# Altium PCB MotorDriverPCB.PcbDoc (part 2 of 2)
Units mm, origin at the board's own origin, x right, y up, seen from the top; angles counter-clockwise.
Board outline 100 x 50 mm, 2 copper layers (Top Layer, Bottom Layer); 108 components, 75 nets, 333 pads, 594 vias.
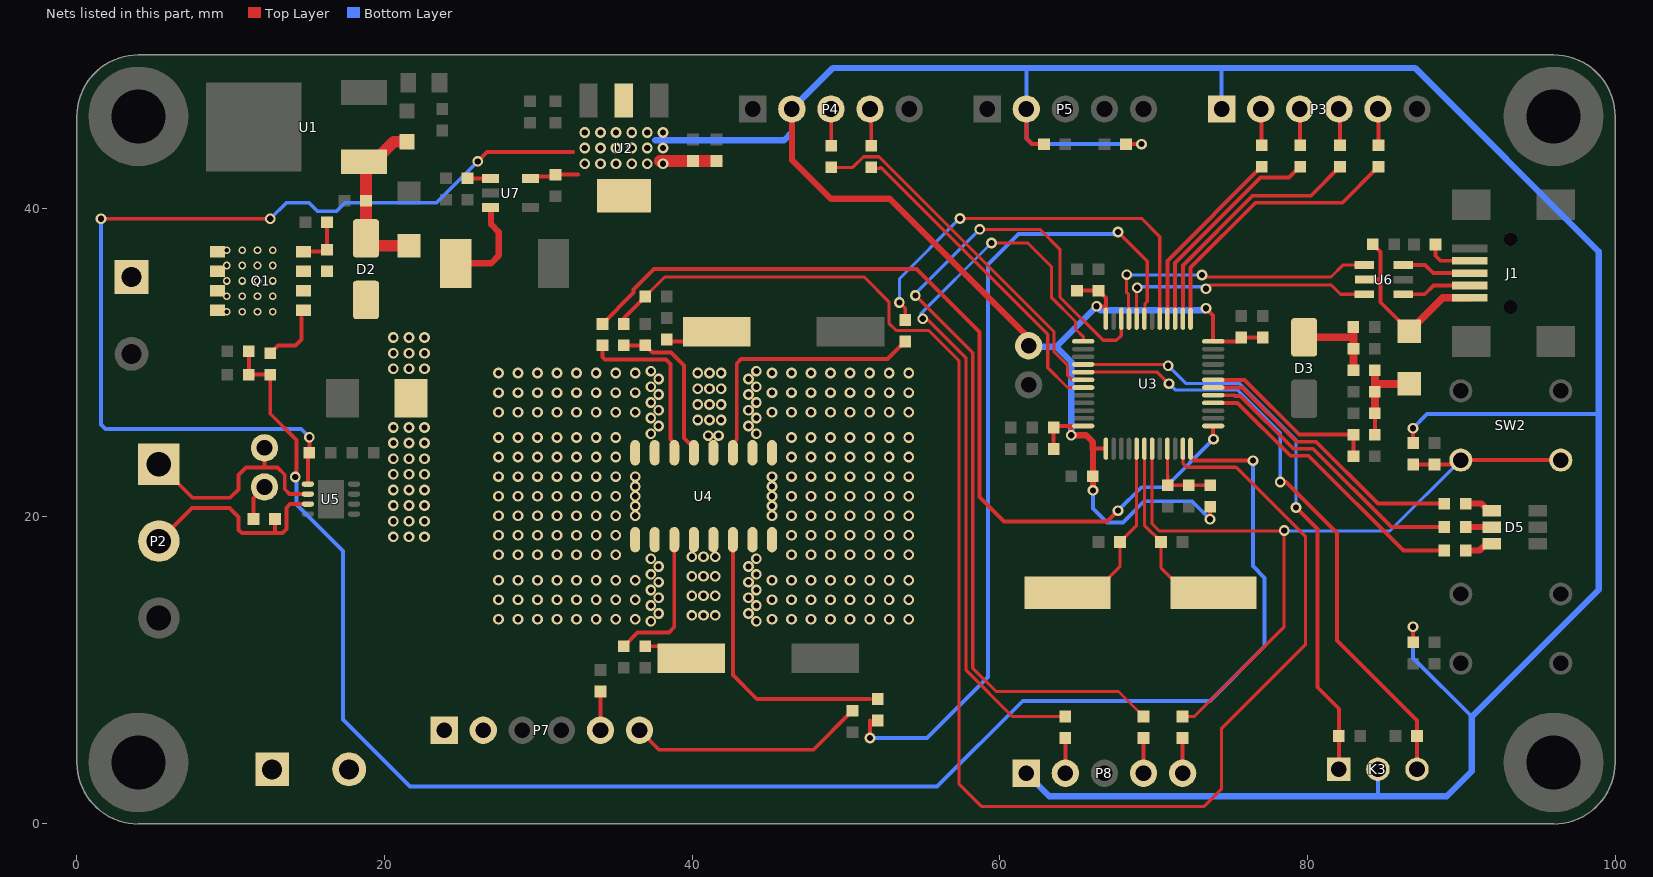
[diagram p2: the nets of this part, all layers, seen from the top]

## Via types
v1: diameter 0.7, hole 0.4, Top Layer to Bottom Layer, tented both sides, 546 vias
v2: diameter 1, hole 0.5, Top Layer to Bottom Layer, 24 vias
v3: diameter 0.5, hole 0.3, Top Layer to Bottom Layer, tented bottom, 20 vias
v4: diameter 0.5, hole 0.33, Top Layer to Bottom Layer, tented bottom, 4 vias

## Nets (pads, with @x,y where several pads share a name; then routed paths per layer and width w, separated by ;. In a path a pad name is that pad's centre, name@x,y a point inside that pad or via, vN(x,y) a via of type N, cw(c..) or ccw(c..) an arc to the next point about the centre after c; other vN are vias at no path point) (continued)
INB: R19.1 U3.31 | length 53.4
  Top Layer w0.203: v1(67.691,38.481) 69.584,36.588 69.584,33.964 69.442,33.822 69.442,32.896 U3.31@69.397,32.851
  Top Layer w0.254: v1(51.562,5.588) 51.562,6.731
  Bottom Layer w0.254: v1(51.562,5.588) 55.27,5.588 59.233,9.55 59.233,36.373 61.214,38.354 67.818,38.354 v1(67.691,38.481)
LED_B: R17.1 U3.16 | length 19
  Top Layer w0.254: U3.16@73.872,27.376 75.459,27.376 78.898,23.937 80.076,23.937 86.233,17.78 R17.1@88.9,17.78
LED_G: R15.1 U3.17 | length 18.6
  Top Layer w0.254: U3.17@73.872,27.876 75.248,27.876 75.291,27.833 75.649,27.833 79.087,24.395 80.369,24.395 85.459,19.304 R15.1@88.9,19.304
LED_R: R12.1 U3.18 | length 18.2
  Top Layer w0.254: U3.18@73.872,28.376 75.753,28.376 79.277,24.852 80.558,24.852 84.582,20.828 R12.1@88.9,20.828
MASTER: K3.1 R33.2 U3.40 | length 38.6
  Top Layer w0.203: U3.40@65.422,29.876 v1@70.861,29.876
  Top Layer w0.254: v1(79.248,20.574) 80.645,19.177 80.645,8.89 82.042,7.493 R33.2@82.042,5.461 ; K3.1@82.042,3.556 R33.2@82.042,5.715
  Bottom Layer w0.203: v1(70.942,29.794) 72.111,28.626 75.606,28.626 79.248,24.984 v1(79.248,20.574)
MOT+: P6.1 P7.1 U4.2 U4.15
  other v1: 37.313,13.183 27.407,13.31 28.677,13.31 29.947,13.31 31.217,13.31 32.487,13.31 33.757,13.31 35.027,13.31 36.297,13.31 37.821,13.691 37.313,14.199 27.407,14.58 28.677,14.58 29.947,14.58 31.217,14.58 32.487,14.58 33.757,14.58 35.027,14.58 36.297,14.58 37.821,14.707 37.313,15.215 37.821,15.723 27.407,15.85 28.677,15.85 29.947,15.85 31.217,15.85 32.487,15.85 33.757,15.85 35.027,15.85 36.297,15.85 37.313,16.231 37.821,16.739 37.313,17.247 37.313,25.375 37.821,25.883 37.313,26.391 27.407,26.772 28.677,26.772 29.947,26.772 31.217,26.772 32.487,26.772 33.757,26.772 35.027,26.772 36.297,26.772 37.821,26.899 37.313,27.407 37.821,27.915 27.407,28.042 28.677,28.042 29.947,28.042 31.217,28.042 32.487,28.042 33.757,28.042 35.027,28.042 36.297,28.042 37.313,28.423 37.821,28.931 27.407,29.312 28.677,29.312 29.947,29.312 31.217,29.312 32.487,29.312 33.757,29.312 35.027,29.312 36.297,29.312 37.313,29.439
MOT-: P6.2 P7.2 U4.7 U4.10
  other v1: 44.171,13.183 45.187,13.31 46.457,13.31 47.727,13.31 48.997,13.31 50.267,13.31 51.537,13.31 52.807,13.31 54.077,13.31 43.663,13.691 44.171,14.199 45.187,14.58 46.457,14.58 47.727,14.58 48.997,14.58 50.267,14.58 51.537,14.58 52.807,14.58 54.077,14.58 43.663,14.707 44.171,15.215 43.663,15.723 45.187,15.85 46.457,15.85 47.727,15.85 48.997,15.85 50.267,15.85 51.537,15.85 52.807,15.85 54.077,15.85 44.171,16.231 43.663,16.739 44.171,17.247 44.171,25.375 43.663,25.883 44.171,26.391 45.187,26.772 46.457,26.772 47.727,26.772 48.997,26.772 50.267,26.772 51.537,26.772 52.807,26.772 54.077,26.772 43.663,26.899 44.171,27.407 43.663,27.915 45.187,28.042 46.457,28.042 47.727,28.042 48.997,28.042 50.267,28.042 51.537,28.042 52.807,28.042 54.077,28.042 44.171,28.423 43.663,28.931 45.187,29.312 46.457,29.312 47.727,29.312 48.997,29.312 50.267,29.312 51.537,29.312 52.807,29.312 54.077,29.312 44.171,29.439
NetC1_1: C1.1 C2.1 D1.K D2.K U1.1 | length 9.7
  Top Layer w0.762: U1.1@18.669,43.053 19.304,43.053 20.606,44.355 D1.K@21.463,44.355 ; D2.K@18.796,38.068 C2.1@18.796,40.513 18.796,42.164 ; D2.K@19.272,37.592 C1.1@21.59,37.592
NetC13_1: C13.1 C14.1 D3.A FB1.2 | length 6
  Top Layer w0.508: D3.A@79.781,31.642 82.979,31.642 ; FB1.2@82.986,29.5 C13.1@82.986,30.897 C14.1@82.986,32.305
NetC16_2: C16.2 U3.5 X1.1 | length 12.2
  Top Layer w0.203: X1.1@64.389,15.037 66.091,15.037 67.818,16.764 C16.2@67.818,18.339 68.897,19.418 U3.5@68.897,24.401
NetC19_2: C19.2 U3.6 X1.2 | length 12.3
  Top Layer w0.203: U3.6@69.397,24.401 69.397,19.427 C19.2@70.485,18.339 70.485,16.637 72.085,15.037 X1.2@73.889,15.037
NetD5_AB: D5.AB R17.2 | length 1.9
  Top Layer w0.406: R17.2@90.297,17.78 91.186,17.78 91.635,18.229 D5.AB@91.972,18.229
NetD5_AG: D5.AG R15.2 | length 1.7
  Top Layer w0.406: R15.2@90.297,19.304 D5.AG@91.972,19.304
NetD5_AR: D5.AR R12.2 | length 1.9
  Top Layer w0.406: R12.2@90.297,20.828 91.313,20.828 91.762,20.379 D5.AR@91.972,20.379
NetJ1_4: J1.4 R9.1 | length 3.1
  Top Layer w0.254: R9.1@88.32,37.679 88.32,36.942 88.648,36.614 J1.4@90.538,36.614
NetK1_1: K1.1 P2.1 U5.6 | length 14.5
  Top Layer w0.254: P2.1@5.334,23.39 7.515,21.209 9.957,21.209 10.496,21.749 10.496,22.688 10.99,23.182 13.039,23.182 13.513,22.708 13.513,21.764 13.828,21.449 U5.6@15.014,21.449 ; 12.196,23.186 K1.1@12.196,24.452
NetK1_2: K1.2 R3.1 | length 2.4
  Top Layer w0.254: R3.1@11.485,19.829 11.485,21.2 K1.2@12.196,21.912
NetP2_2: P2.2 R3.2 U5.7 | length 14.2
  Top Layer w0.254: P2.2@5.334,18.39 7.493,20.549 9.931,20.549 10.516,19.964 10.516,19.126 10.719,18.923 13.36,18.923 13.614,19.177 13.614,20.549 13.865,20.799 U5.7@15.014,20.799 ; 12.882,18.927 R3.2@12.882,19.829
NetP3_2: P3.2 R29.2 | length 2.3
  Top Layer w0.254: R29.2@77.022,44.133 P3.2@77.022,46.422
NetP3_3: P3.3 R30.2 | length 2.3
  Top Layer w0.254: R30.2@79.522,44.133 P3.3@79.522,46.462
NetP3_4: P3.4 R31.2 | length 2.3
  Top Layer w0.254: R31.2@82.122,44.133 P3.4@82.122,46.402
NetP3_5: P3.5 R32.2 | length 2.3
  Top Layer w0.254: R32.2@84.622,44.133 P3.5@84.622,46.442
NetP4_3: P4.3 R4.2 | length 2.4
  Top Layer w0.254: R4.2@49.042,44.087 P4.3@49.042,46.462
NetP4_4: P4.4 R5.2 | length 2.3
  Top Layer w0.254: R5.2@51.642,44.087 P4.4@51.642,46.402
NetP7_5: P7.5 R24.2 | length 2.5
  Top Layer w0.254: P7.5@34.036,6.096 R24.2@34.036,8.611
NetP7_6: P7.6 R25.2 | length 15.4
  Top Layer w0.254: P7.6@36.576,6.096 37.846,4.826 47.879,4.826 R25.2@50.419,7.366
NetP8_2: P8.2 R35.2 | length 2.3
  Top Layer w0.254: P8.2@64.262,3.302 R35.2@64.262,5.588
NetP8_4: P8.4 R36.2 | length 2.3
  Top Layer w0.254: P8.4@69.342,3.302 R36.2@69.342,5.588
NetP8_5: P8.5 R37.2 | length 2.3
  Top Layer w0.254: P8.5@71.882,3.302 R37.2@71.882,5.588
NetQ1_G: Q1.G R6.1 R7.1 | length 3.4
  Top Layer w0.254: Q1.G@14.733,37.211 16.129,37.211 R6.1@16.256,37.338 R7.1@16.256,39.116
NetR18_2: R18.2 U4.3 | length 9.5
  Top Layer w0.254: R18.2@35.56,11.557 36.449,12.446 38.481,12.446 38.837,12.802 U4.3@38.837,18.486
NetR19_2: R19.2 U4.6 | length 18.4
  Top Layer w0.254: U4.6@42.647,18.486 42.647,9.677 44.196,8.128 51.562,8.128
NetR20_2: R20.2 U4.11 | length 17.5
  Top Layer w0.254: U4.11@42.647,24.136 42.647,24.74 42.901,24.994 42.901,29.947 43.18,30.226 52.705,30.226 R20.2@53.848,31.369
NetR22_2: R22.2 U4.14 | length 11.2
  Top Layer w0.254: R22.2@34.163,31.115 34.163,30.353 34.315,30.201 38.288,30.201 38.583,29.906 38.583,24.994 38.837,24.74 U4.14@38.837,24.136
NetR23_2: R23.2 R26.1 U4.13 | length 10.6
  Top Layer w0.254: R23.2@35.56,31.115 R26.1@36.957,31.115 37.414,30.658 38.633,30.658 39.472,29.82 39.472,25.09 40.107,24.455 U4.13@40.107,24.136 ; R26.1@36.957,31.369 R26.1@37.125,31.369
NetR27_2: R27.2 U4.1 U4.8 U4.9 U4.16 U7.3 | length 5.8
  Top Layer w0.406: R27.2@25.146,36.449 26.924,36.449 27.432,36.957 27.432,38.481 26.924,38.989 U7.3@26.924,40.071
  other v1: 27.407,17.501 28.677,17.501 29.947,17.501 31.217,17.501 32.487,17.501 33.757,17.501 35.027,17.501 46.457,17.501 47.727,17.501 48.997,17.501 50.267,17.501 51.537,17.501 52.807,17.501 54.077,17.501 27.407,18.771 28.677,18.771 29.947,18.771 31.217,18.771 32.487,18.771 33.757,18.771 35.027,18.771 46.457,18.771 47.727,18.771 48.997,18.771 50.267,18.771 51.537,18.771 52.807,18.771 54.077,18.771 27.407,20.041 28.677,20.041 29.947,20.041 31.217,20.041 32.487,20.041 33.757,20.041 35.027,20.041 36.297,20.041 45.187,20.041 46.457,20.041 47.727,20.041 48.997,20.041 50.267,20.041 51.537,20.041 52.807,20.041 54.077,20.041 36.297,20.676 45.187,20.676 27.407,21.311 28.677,21.311 29.947,21.311 31.217,21.311 32.487,21.311 33.757,21.311 35.027,21.311 36.297,21.311 45.187,21.311 46.457,21.311 47.727,21.311 48.997,21.311 50.267,21.311 51.537,21.311 52.807,21.311 54.077,21.311 36.297,21.946 45.187,21.946 27.407,22.581 28.677,22.581 29.947,22.581 31.217,22.581 32.487,22.581 33.757,22.581 35.027,22.581 36.297,22.581 45.187,22.581 46.457,22.581 47.727,22.581 48.997,22.581 50.267,22.581 51.537,22.581 52.807,22.581 54.077,22.581 27.407,23.851 28.677,23.851 29.947,23.851 31.217,23.851 32.487,23.851 33.757,23.851 35.027,23.851 46.457,23.851 47.727,23.851 48.997,23.851 50.267,23.851 51.537,23.851 52.807,23.851 54.077,23.851 27.407,25.121 28.677,25.121 29.947,25.121 31.217,25.121 32.487,25.121 33.757,25.121 35.027,25.121 46.457,25.121 47.727,25.121 48.997,25.121 50.267,25.121 51.537,25.121 52.807,25.121 54.077,25.121
NetR28_1: R28.1 U7.1 | length 1.5
  Top Layer w0.254: R28.1@25.415,41.971 U7.1@26.894,41.971
NRST: C17.1 R13.1 R37.1 SW2.1 SW2.2 U3.7 | length 52.2
  Top Layer w0.203: U3.7@69.897,24.401 69.897,19.511 70.358,19.05 v1@78.46,19.05 ; R37.1@71.882,6.985 72.644,6.985 78.486,12.827 v1(78.486,19.076) v1@78.486,19.203
  Top Layer w0.254: R13.1@86.868,23.368 C17.1@88.265,23.368 89.678,23.368 SW2.2@89.968,23.658 SW2.1@96.468,23.658
  Bottom Layer w0.203: v1@78.486,19.203 78.639,19.05 85.36,19.05 SW2.2@89.968,23.658
PWM: R20.1 U3.29 | length 27.2
  Top Layer w0.203: v1(53.467,33.909) 53.848,33.528 R20.1@53.848,32.766 ; v1(57.404,39.37) 69.215,39.37 70.397,38.188 U3.29@70.397,32.851
  Bottom Layer w0.203: v1(53.467,33.909) 53.467,35.433 v1(57.404,39.37)
SEL0: R22.1 U3.13 | length 57.5
  Top Layer w0.254: R22.1@34.163,32.512 36.195,34.544 36.195,34.757 37.506,36.068 54.585,36.068 58.674,31.979 58.674,21.26 60.274,19.66 66.98,19.66 v1(67.691,20.371) ; v1@73.872,25.036 U3.13@73.872,25.876
  Bottom Layer w0.254: v1(67.691,20.371) 69.215,21.895 70.764,21.895 v1(73.889,25.019)
SLAVE: K3.3 R34.2 U3.41 | length 40.2
  Top Layer w0.203: U3.41@65.422,29.376 70.243,29.376 v1(70.993,28.626)
  Top Layer w0.254: v1(78.232,22.225) 78.601,22.225 81.915,18.911 81.915,11.938 87.122,6.731 K3.3@87.122,3.556
  Bottom Layer w0.203: v1(70.993,28.626) 71.399,28.219 75.438,28.219 78.232,25.425 v1(78.232,22.225)
SPI_CS: R32.1 U3.25 | length 18.3
  Top Layer w0.254: U3.25@72.397,32.851 72.397,36.171 76.612,40.386 82.272,40.386 R32.1@84.622,42.736
SPI_MISO: R30.1 U3.27 | length 14.3
  Top Layer w0.254: U3.27@71.397,32.851 71.397,36.464 76.957,42.025 78.811,42.025 R30.1@79.522,42.736
SPI_MOSI: R29.1 U3.28 | length 12.4
  Top Layer w0.254: U3.28@70.897,32.851 70.897,36.611 R29.1@77.022,42.736
SPI_SCLK: R31.1 U3.26 | length 16.4
  Top Layer w0.254: U3.26@71.897,32.851 71.897,36.318 76.422,40.843 80.229,40.843 R31.1@82.122,42.736
SWCLK: R35.1 U3.37 | length 49
  Top Layer w0.203: v1@54.864,32.842 55.245,32.842 57.81,30.277 57.81,9.992 60.817,6.985 R35.1@64.262,6.985 ; v1@59.487,37.77 61.824,37.77 63.348,36.246 63.348,34.239 64.922,32.664 64.922,32.182 65.422,31.682 U3.37@65.422,31.376
  Bottom Layer w0.203: v1@54.864,32.842 54.864,33.172 v1(59.461,37.77)
  other v1: 54.991,32.842
SWDIO: R36.1 U3.34 | length 59.4
  Top Layer w0.203: v1(54.508,34.366) 58.242,30.632 58.242,10.135 59.766,8.611 67.716,8.611 R36.1@69.342,6.985 ; v1(58.699,38.659) 62.611,38.659 63.906,37.363 63.906,34.265 66.726,31.445 67.589,31.445 67.897,31.753 U3.34@67.897,32.851
  Bottom Layer w0.203: v1(54.508,34.366) 54.508,34.468 v1(58.699,38.659)
UART1_RX: R5.1 U3.43 | length 21.1
  Top Layer w0.203: R5.1@51.642,42.69 51.725,42.607 52.177,42.607 52.26,42.69 63.119,31.831 63.119,29.658 64.401,28.376 U3.43@65.422,28.376
UART1_TX: R4.1 U3.42 | length 23.8
  Top Layer w0.203: R4.1@49.042,42.69 50.449,42.69 51.135,43.376 52.149,43.376 63.525,32 63.525,30.702 64.389,29.839 64.389,29.19 64.658,28.921 65.377,28.921 U3.42@65.422,28.876
USB_N: U3.32 U6.6 | length 16.7
  Top Layer w0.203: U3.32@68.897,32.851 v1@68.897,34.734 ; v1(73.406,34.798) 73.66,35.052 81.534,35.052 82.145,34.441 U6.6@83.698,34.441
  Bottom Layer w0.203: v1@69.088,34.925 v1@73.279,34.925
  other v1: 68.929,34.865
USB_P: U3.33 U6.4 | length 18.6
  Top Layer w0.203: v1@68.224,35.686 68.224,34.573 68.371,34.425 U3.33@68.371,32.851 ; v1@73.279,35.56 81.534,35.56 82.32,36.346 U6.4@83.698,36.346
  Top Layer w0.254: v1(73.152,35.687) v1@73.279,35.56
  Bottom Layer w0.203: v1@68.428,35.712 68.453,35.687 v1(73.152,35.687)
  other v1: 68.25,35.712
USBX_N: J1.2 U6.1 | length 4.5
  Top Layer w0.254: U6.1@86.238,34.441 87.622,34.441 88.195,35.014 J1.2@90.538,35.014
USBX_P: J1.3 U6.3 | length 4.5
  Top Layer w0.254: U6.3@86.238,36.346 87.646,36.346 88.178,35.814 J1.3@90.538,35.814
VBAT: P1.1 Q1.D
  other v3: 9.74,33.306 10.74,33.306 11.74,33.306 12.741,33.306 9.74,34.306 10.74,34.306 11.74,34.306 12.741,34.306 9.74,35.306 10.74,35.306 11.74,35.306 12.741,35.306 9.74,36.306 10.74,36.306 11.74,36.306 12.741,36.306 9.74,37.306 10.74,37.306 11.74,37.306 12.741,37.306
VBAT_ADC: C18.1 R14.2 R16.1 U3.12 | length 109.9
  Top Layer w0.254: R16.1@11.176,30.734 C18.1@11.176,29.21 R14.2@12.573,29.21 12.573,26.67 14.275,24.968 14.275,22.631 v1(14.199,22.555) ; U3.12@72.397,24.401 72.397,23.844 72.619,23.622 v1(76.454,23.622)
  Bottom Layer w0.254: v1@14.275,22.555 14.275,20.777 17.297,17.755 17.297,6.793 21.652,2.438 55.928,2.438 61.491,8.001 73.66,8.001 77.216,11.557 77.216,16.002 76.454,16.764 v1(76.454,23.622)
VBUS: C36.1 F1.1 J1.1 U6.5 | length 12.4
  Top Layer w0.254: U6.5@83.713,35.391 84.689,35.391 ; C36.1@84.238,37.691 84.738,37.191 84.738,33.92 F1.1@86.618,32.04
  Top Layer w0.508: F1.1@86.618,32.04 88.792,34.214 J1.1@90.538,34.214
VBUS_FUSED: C11.1 C12.1 F1.2 FB1.1 R8.1 | length 6.4
  Top Layer w0.254: R8.1@84.383,25.309 C11.1@84.383,26.706
  Top Layer w0.508: C11.1@84.383,26.706 C12.1@84.383,28.103 FB1.1@84.383,29.5 ; 84.383,28.611 F1.2@86.618,28.611
VBUS_SENSE: R8.2 R10.2 U3.19 | length 12
  Top Layer w0.254: U3.19@73.872,28.876 75.899,28.876 79.466,25.309 R8.2@82.986,25.309 R10.2@82.986,23.912
VCC: C5.1 C9.1 C10.1 C21.1 C22.1 C23.1 C24.1 C25.1 C26.1 C27.1 C31.1 FB2.1 K2.1 K3.2 P3.1 P4.2 P5.2 P8.1 R1.1 R2.1 R11.2 R13.2 U2.2 U2.4 U3.1 U3.24 U3.36 U3.48 U5.5 U7.5 | length 321.7
  Top Layer w0.254: v1(1.575,39.345) v1(12.573,39.345) ; U5.5@15.014,22.099 C5.1@15.014,24.031 ; C5.1@15.113,24.13 v1(15.113,25.146) ; v1(26.06,43.078) 26.67,43.688 32.258,43.688 ; U7.5@29.611,42.088 31.039,42.088 31.115,42.164 C31.1@31.115,42.215 32.588,42.215 ; P5.2@61.722,46.482 61.722,44.577 62.103,44.196 R1.1@62.865,44.196 ; C26.1@63.5,24.384 C27.1@63.5,25.781 ; C27.1@63.595,25.876 64.643,25.876 ; v1(64.643,25.273) 64.643,25.876 ; C22.1@65.024,34.671 C23.1@66.421,34.671 66.897,34.195 66.897,33.655 ; U3.48@65.422,25.876 64.643,25.876 ; 66.04,24.384 66.057,24.401 U3.1@66.897,24.401 ; v1(66.294,33.655) 66.897,33.655 ; U3.36@66.897,32.851 66.897,33.655 ; R2.1@68.199,44.196 v1(69.215,44.196) ; v1(73.406,33.528) 73.872,33.062 U3.24@73.872,31.376 C24.1@75.438,31.376 ; v1(73.66,19.812) FB2.1@73.66,20.599 ; C24.1@75.692,31.623 C25.1@77.089,31.623 ; R11.2@86.868,11.811 v1(86.868,12.827) ; R13.2@86.868,24.765 v1(86.868,25.73)
  Top Layer w0.406: P4.2@46.482,46.482 46.482,43.18 49.022,40.64 52.832,40.64 61.874,31.598 K2.1@61.874,31.09 ; v1(64.643,25.273) 65.608,25.273 66.04,24.841 66.04,24.384 ; 66.057,24.401 66.057,22.623 C21.1@66.04,22.606 66.065,22.581 v1(66.065,21.692)
  Top Layer w0.762: v1@37.897,43.104 C10.1@40.056,43.104 C9.1@41.58,43.104
  Bottom Layer w0.254: v1(1.575,39.345) 1.575,25.959 1.863,25.671 14.588,25.671 v1(15.113,25.146) ; v1(12.573,39.345) 13.614,40.386 15.091,40.386 15.644,39.833 16.889,39.833 17.442,40.386 23.368,40.386 v1(26.06,43.078) ; 61.722,49.149 P5.2@61.722,46.482 61.722,44.577 62.103,44.196 v1(69.215,44.196) ; v1(66.065,21.692) 66.065,20.498 66.954,19.609 67.996,19.609 69.367,20.98 72.492,20.98 v1(73.66,19.812) ; P3.1@74.422,46.482 74.422,49.149 ; 84.582,2.057 K3.2@84.582,3.556 ; v1(86.868,12.827) 86.868,10.795 90.678,6.985 ; v1(86.868,25.73) 87.782,26.645 98.933,26.645
  Bottom Layer w0.406: 37.592,44.45 45.974,44.45 46.482,44.958 P4.2@46.482,46.482 49.149,49.149 74.422,49.149 86.995,49.149 98.933,37.211 98.933,26.645 98.933,15.24 90.678,6.985 90.678,3.429 89.052,1.803 63.221,1.803 P8.1@61.722,3.302 ; K2.1@61.784,31.031 63.67,31.031 ; v1(64.643,25.273) 64.643,30.058 63.67,31.031 ; v1@73.406,33.401 66.548,33.401 v1(66.294,33.655) 63.67,31.031
  other v1: 33.02,42.926 34.036,42.926 35.052,42.926 36.068,42.926 37.084,42.926 38.1,42.926 33.02,43.942 34.036,43.942 35.052,43.942 36.068,43.942 37.084,43.942 38.1,43.942 33.02,44.958 34.036,44.958 35.052,44.958 36.068,44.958 37.084,44.958 38.1,44.958
VDDA: C28.1 C29.1 FB2.2 U3.9 | length 5.1
  Top Layer w0.203: 70.897,22.677 U3.9@70.897,24.401 ; C28.1@70.917,22.022 70.917,22.657
  Top Layer w0.254: C28.1@70.917,22.022 C29.1@72.288,22.022 FB2.2@73.685,22.022
VIN: C32.1 C33.1 C34.1 C35.1 D2.A D4.K Q1.S R6.2 R14.1 U4.4 U4.5 U4.12 | length 7
  Top Layer w0.254: R14.1@12.573,30.607 13.081,31.115 14.224,31.115 14.605,31.496 14.605,32.893 ; C33.1@36.957,11.557 C34.1@37.973,11.557 ; C32.1@38.354,31.369 C35.1@40.569,31.369
  other v1: 39.98,13.564 40.742,13.564 41.504,13.564 39.98,14.834 40.742,14.834 41.504,14.834 39.98,16.104 40.742,16.104 41.504,16.104 39.98,17.374 40.742,17.374 41.504,17.374 20.574,18.669 21.59,18.669 22.606,18.669 20.574,19.685 21.59,19.685 22.606,19.685 20.574,20.701 21.59,20.701 22.606,20.701 20.574,21.717 21.59,21.717 22.606,21.717 20.574,22.733 21.59,22.733 22.606,22.733 20.574,23.749 21.59,23.749 22.606,23.749 20.574,24.765 21.59,24.765 22.606,24.765 41.046,25.248 41.707,25.248 20.574,25.781 21.59,25.781 22.606,25.781 40.361,26.264 41.123,26.264 41.885,26.264 40.361,27.28 41.123,27.28 41.885,27.28 40.361,28.296 41.123,28.296 41.885,28.296 40.361,29.312 41.123,29.312 41.885,29.312 20.574,29.591 21.59,29.591 22.606,29.591 20.574,30.607 21.59,30.607 22.606,30.607 20.574,31.623 21.59,31.623 22.606,31.623
VNH_CS: C20.1 R23.1 U3.11 | length 101.6
  Top Layer w0.203: C20.1@36.957,34.29 38.227,35.56 51.181,35.56 52.784,33.957 52.784,32.56 53.264,32.08 55.372,32.08 57.353,30.099 57.353,2.591 58.801,1.143 73.279,1.143 74.422,2.286 74.422,6.223 79.883,11.684 79.883,18.669 75.362,23.19 72.161,23.19 71.897,23.455 U3.11@71.897,24.401
  Top Layer w0.254: R23.1@35.56,32.512 35.56,32.893 C20.1@36.957,34.29
pads on no net: D2.0 D3.0 J1. U3.2 U3.3 U3.4 U3.20

## Polygon pours and split planes (outlines as drawn)
GND on Bottom Layer "Bottom Layer-GND" (solid, remove dead copper, pour order 4): 0,50 100.33,50 100.33,0 0,0 0,50

## Keep-outs
Keep-Out Layer:
  the board outline again, w0.254

## Other copper
Top Layer:
  region net MOT-: 56.896,29.82 55.093,29.82 55.093,12.802 56.896,12.802
  rectangle net GND: 1.524,2.032 6.477,10.922
  rectangle net GND: 7.493,41.275 16.764,49.276
  rectangle net GND: 44.704,8.763 50.165,12.065
  rectangle net GND: 46.348,30.709 51.809,34.011
  region net 5V: 20.193,45.72 20.193,49.276 17.145,49.276 17.145,45.72
  rectangle net GND: 23.952,47.803 24.841,48.565
  region net NetR27_2: 23.597,38.1 23.597,16.866 26.518,16.866 26.518,38.1
  rectangle net GND: 14.097,26.162 18.923,30.226
  region net VIN: 20.168,31.75 20.168,18.161 23.089,18.161 23.089,31.75
  region net MOT-: 27.686,7.366 25.273,7.366 25.273,4.191 27.686,4.191
  rectangle net MOT-: 15.668,1.778 19.732,5.461
  rectangle net MOT-: 15.672,0.508 52.832,4.216
  rectangle net MOT-: 52.807,0.508 56.871,12.802
  rectangle net MOT+: 22.606,4.826 25.019,12.954
  rectangle net MOT+: 14.732,12.802 26.772,16.51
  rectangle net MOT+: 10.668,1.778 14.732,16.51
  rectangle net VIN: 39.853,25.248 42.393,31.09
  rectangle net VIN: 39.472,11.659 40.742,22.962
  region net MOT-: 55.093,29.82 43.282,29.82 43.282,26.137 55.093,26.137
  rectangle net MOT+: 26.772,12.802 38.202,16.485
  region net MOT-: 55.118,16.485 43.282,16.485 43.282,12.802 55.118,12.802
  rectangle net MOT+: 26.772,26.137 38.202,29.82
  rectangle net MOT+: 36.932,16.485 38.202,26.137
  rectangle net VIN: 40.742,11.659 42.012,25.248
  region net NetR27_2: 54.712,25.756 44.806,25.756 44.806,16.866 54.712,16.866
  rectangle net NetR27_2: 26.416,16.866 36.678,25.756
  rectangle net MOT-: 43.282,16.485 44.552,26.137
  region net GND: 34.798,39.243 29.972,39.243 29.972,33.655 34.798,33.655
  rectangle net GND: 89.281,39.126 99.441,41.412
  rectangle net GND: 89.281,30.226 99.441,32.512
  rectangle net VIN: 13.97,31.734 23.089,36.449
  rectangle net VBAT: 1.524,32.639 13.716,38.227
  rectangle net VCC: 34.95,45.339 36.17,45.974
  rectangle net GND: 37.211,45.847 39.751,48.387
  rectangle net VCC: 32.258,41.91 38.862,45.466
  rectangle net GND: 0.635,26.162 5.588,31.75
  rectangle net GND: 0.635,10.922 3.302,26.162
  rectangle net GND: 3.302,10.922 7.62,15.875
  rectangle net GND: 94.234,17.653 96.901,20.955
  rectangle net 5V: 78.918,28.524 80.62,29.794
Bottom Layer:
  region net MOT-: 56.896,29.82 55.093,29.82 55.093,12.802 56.896,12.802
  rectangle net GND: 7.493,41.275 16.764,49.276
  rectangle net GND: 44.704,8.763 50.165,12.065
  rectangle net GND: 46.348,30.709 51.809,34.011
  region net 5V: 20.193,45.72 20.193,49.276 17.145,49.276 17.145,45.72
  rectangle net GND: 19.558,33.528 35.052,39.37
  rectangle net GND: 13.462,26.67 19.812,39.37
  rectangle net GND: 1.956,26.162 19.812,32.258
  region net VIN: 20.168,31.217 20.168,12.421 23.089,12.421 23.089,31.217
  rectangle net VIN: 20.168,9.5 43.028,12.421
  rectangle net VIN: 20.168,30.201 43.028,33.122
  rectangle net MOT+: 23.597,12.802 26.391,29.82
  region net VIN: 43.028,19.279 38.456,19.279 38.456,12.421 43.028,12.421
  rectangle net VIN: 38.456,23.343 43.028,30.201
  rectangle net MOT-: 43.282,23.343 44.552,26.137
  region net MOT-: 44.552,19.279 43.282,19.279 43.282,16.485 44.552,16.485
  region net MOT+: 38.202,19.279 36.932,19.279 36.932,16.485 38.202,16.485
  region net MOT-: 55.093,29.82 43.282,29.82 43.282,26.137 55.093,26.137
  rectangle net MOT+: 26.391,12.802 38.202,16.485
  region net MOT-: 55.093,16.485 43.282,16.485 43.282,12.802 55.093,12.802
  rectangle net MOT+: 26.391,26.137 38.202,29.82
  rectangle net MOT+: 36.932,23.343 38.202,26.137
  region net NetR27_2: 54.712,25.756 44.806,25.756 44.806,16.866 54.712,16.866
  rectangle net NetR27_2: 26.772,16.866 36.678,25.756
  rectangle net NetR27_2: 34.138,19.787 47.346,22.835
  rectangle net VCC: 32.258,42.418 38.862,45.466
  rectangle net VBAT: 9.017,32.639 13.208,38.227

## Silkscreen, mask and mechanical layers (free items; w line width, h text height)
Top Overlay:
  drawing of 1317 lines, arcs and shapes, not listed
  text "UART" at 46.609,48.006 h1.52
  text "I2C" at 62.357,48.006 h1.52
  text "SPI" at 78.994,48.006 h1.52
  text "IN" at 0.762,41.148 h1.52 r270
  text "+" at 3.175,39.878 h1.52 r270
  text "+" at 41.681,33.553 h1.52
  text "BOOT" at 58.293,32.512 h1.52 r270
  text "RESET" at 99.314,22.606 h1.52 r90
  text "V1.0" at 20.908,17.245 h1
  text "September 2019" at 20.828,15.621 h1
  text "c TKJ Electronics" at 20.808,13.67 h1
  text "USER" at 99.314,9.906 h1.52 r90
  text "CAN" at 3.048,8.509 h1.52
  text "MOTOR" at 11.811,8.509 h1.52
  text "+" at 40.03,7.772 h1.52
  text "+" at 8.001,4.064 h1.52 r270
  text "ENCODER" at 28.575,3.048 h1.27
  text "+" at 23.393,2.946 h1.52
  text "-" at 25.933,2.946 h1.52
  text "JTAG" at 54.102,2.54 h1.52
  text "MOTOR" at 26.035,0.508 h1.52
  text "A" at 81.534,0.508 h1.52
  text "0" at 84.074,0.508 h1.52
  text "B" at 86.614,0.508 h1.52
Bottom Overlay:
  drawing of 2465 lines, arcs and shapes, not listed
  text "5V" at 43.18,40.767 h1.52 r270
  text "VCC" at 45.72,40.767 h1.52 r270
  text "TX" at 48.26,40.767 h1.52 r270
  text "RX" at 50.8,40.767 h1.52 r270
  text "GND" at 53.34,40.767 h1.52 r270
  text "5V" at 58.42,40.767 h1.52 r270
  text "VCC" at 60.96,40.767 h1.52 r270
  text "SCL" at 63.5,40.767 h1.52 r270
  text "SDA" at 66.04,40.767 h1.52 r270
  text "GND" at 68.58,40.767 h1.52 r270
  text "VCC" at 73.66,39.243 h1.52 r270
  text "MOSI" at 76.2,39.243 h1.52 r270
  text "MISO" at 78.74,39.243 h1.52 r270
  text "SCLK" at 81.28,39.243 h1.52 r270
  text "CS" at 83.82,39.243 h1.52 r270
  text "GND" at 86.36,39.243 h1.52 r270
  text "+" at 0.279,36.043 h1.52 r270
  text "-" at 0.279,31.043 h1.52 r270
  text "30V MAX" at 5.715,28.829 h1.27 r270
  text "BOOT" at 63.373,27.305 h1.52 r270
  text "CANL" at 1.524,21.336 h1.14 r270
  text "TERM" at 13.589,20.193 h1.52 r270
  text "CANH" at 1.524,16.256 h1.14 r270
  text "GND" at 1.524,11.938 h1.14 r270
  text "MOT+" at 23.114,7.747 h1.52 r270
  text "MOT-" at 25.654,7.747 h1.52 r270
  text "GND" at 28.194,7.747 h1.52 r270
  text "5V" at 30.861,7.747 h1.52 r270
  text "A" at 33.274,7.747 h1.52 r270
  text "B" at 35.814,7.747 h1.52 r270
  text "VCC" at 60.96,4.953 h1.52 r270
  text "SWCLK" at 63.5,4.953 h1.52 r270
  text "GND" at 66.04,4.953 h1.52 r270
  text "SWDIO" at 68.58,4.953 h1.52 r270
  text "NRST" at 71.12,4.953 h1.52 r270
  text "CONFIG" at 88.646,4.953 h1.52
  text "A" at 82.55,0.762 h1.52
  text "0" at 85.09,0.762 h1.52
  text "B" at 87.63,0.762 h1.52
  text "+" at 12.217,0.279 h1.52
  text "-" at 17.217,0.279 h1.52

## Dimensions
-1.981,0 to -1.549,50.013 on Mechanical 1
0.025,-1.6 to 100,-1.346 on Mechanical 1